# Altium PCB CorroSenseBoard_V4_DaugtherBoard.PcbDoc
Units mm, origin at the board's own origin, x right, y up, seen from the top; angles counter-clockwise.
Board outline 50.17 x 44.45 mm, 4 copper layers (Top Layer, +5V, -5V, Bottom Layer), stack 0.603 mm thick; 75 components, 51 nets, 238 pads, 46 vias.
Unrouted connection lines stored in the file: 7.
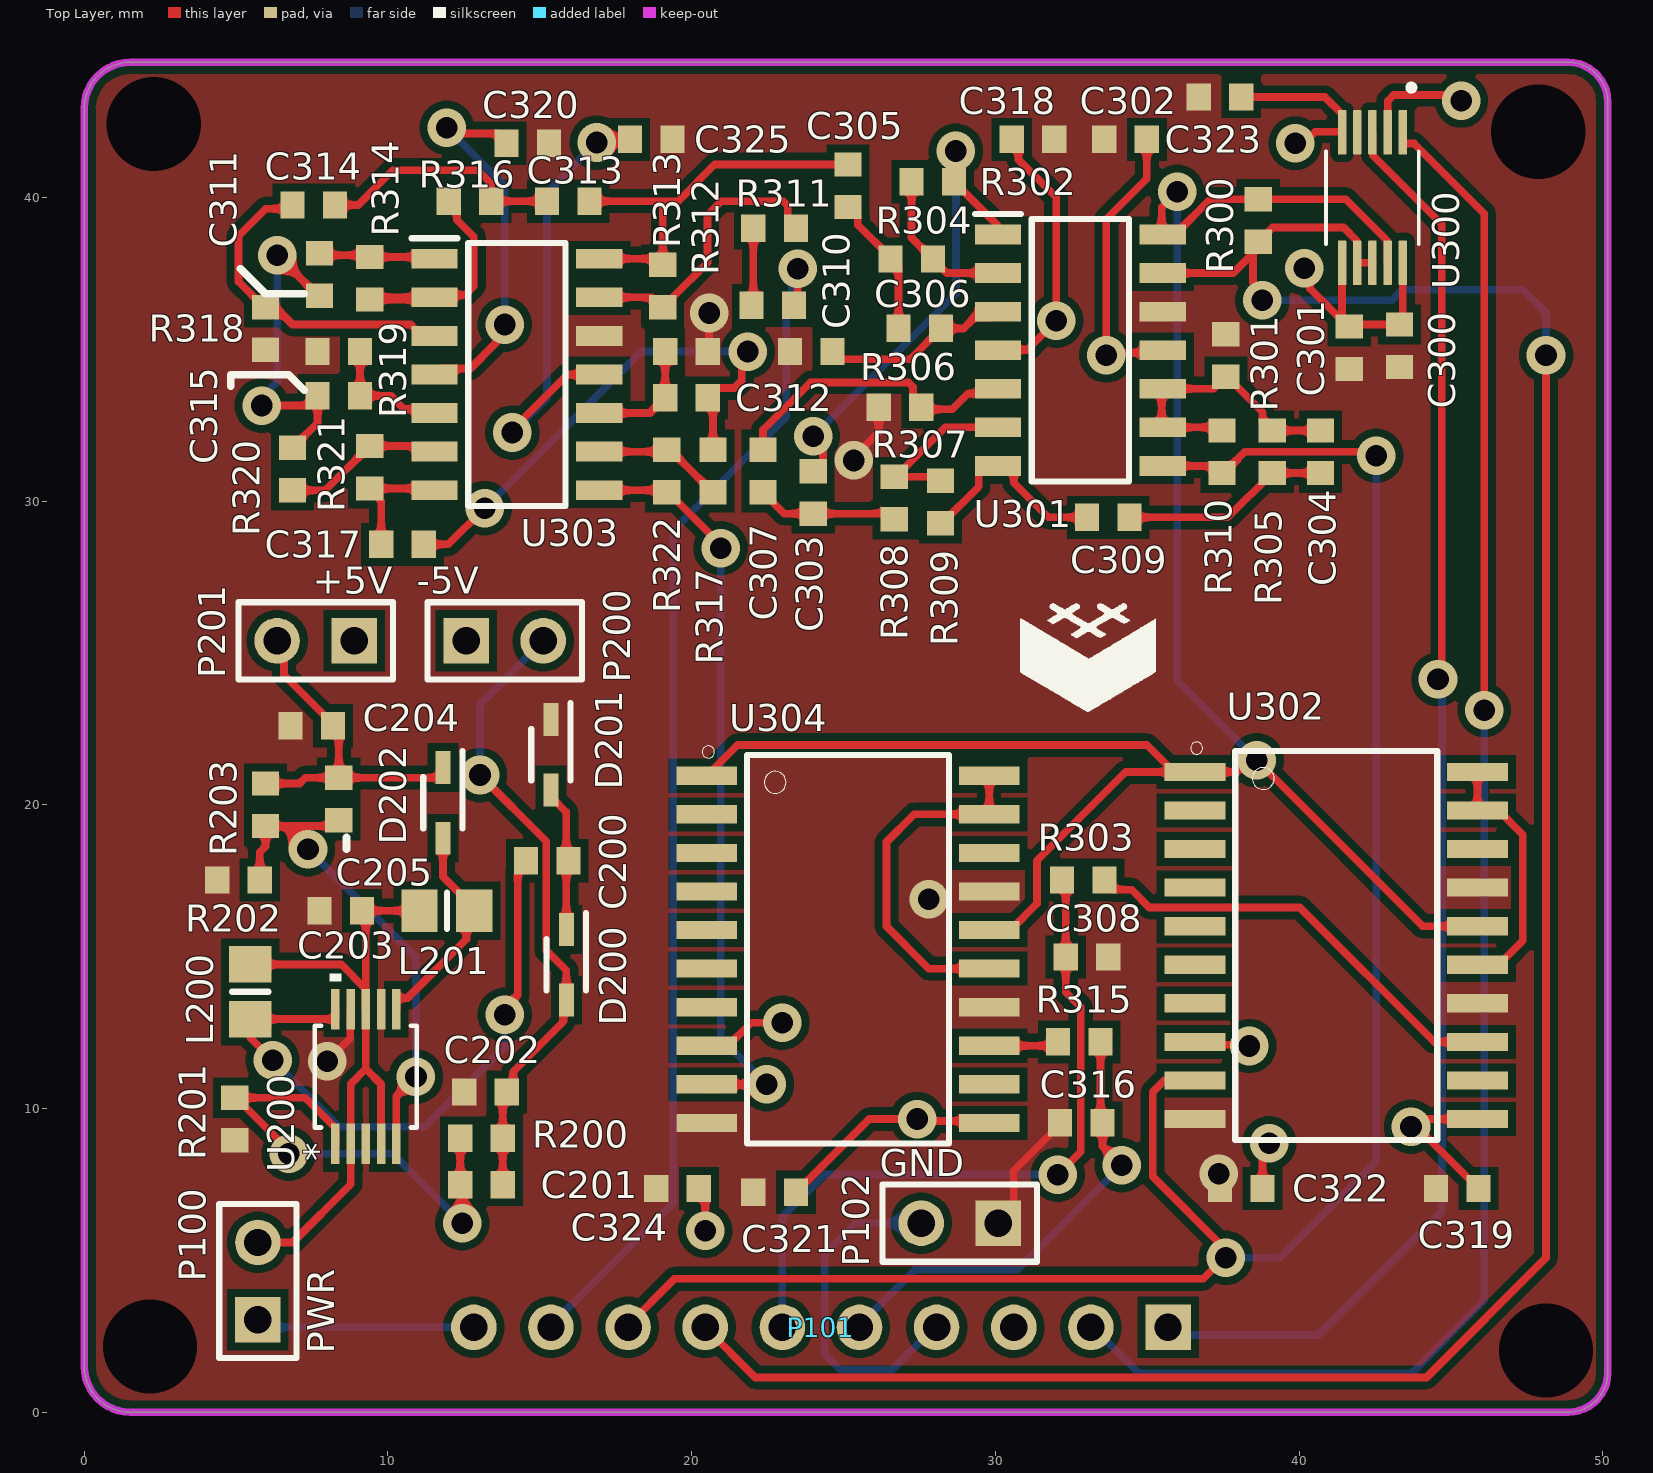
[diagram p0: Top Layer view]
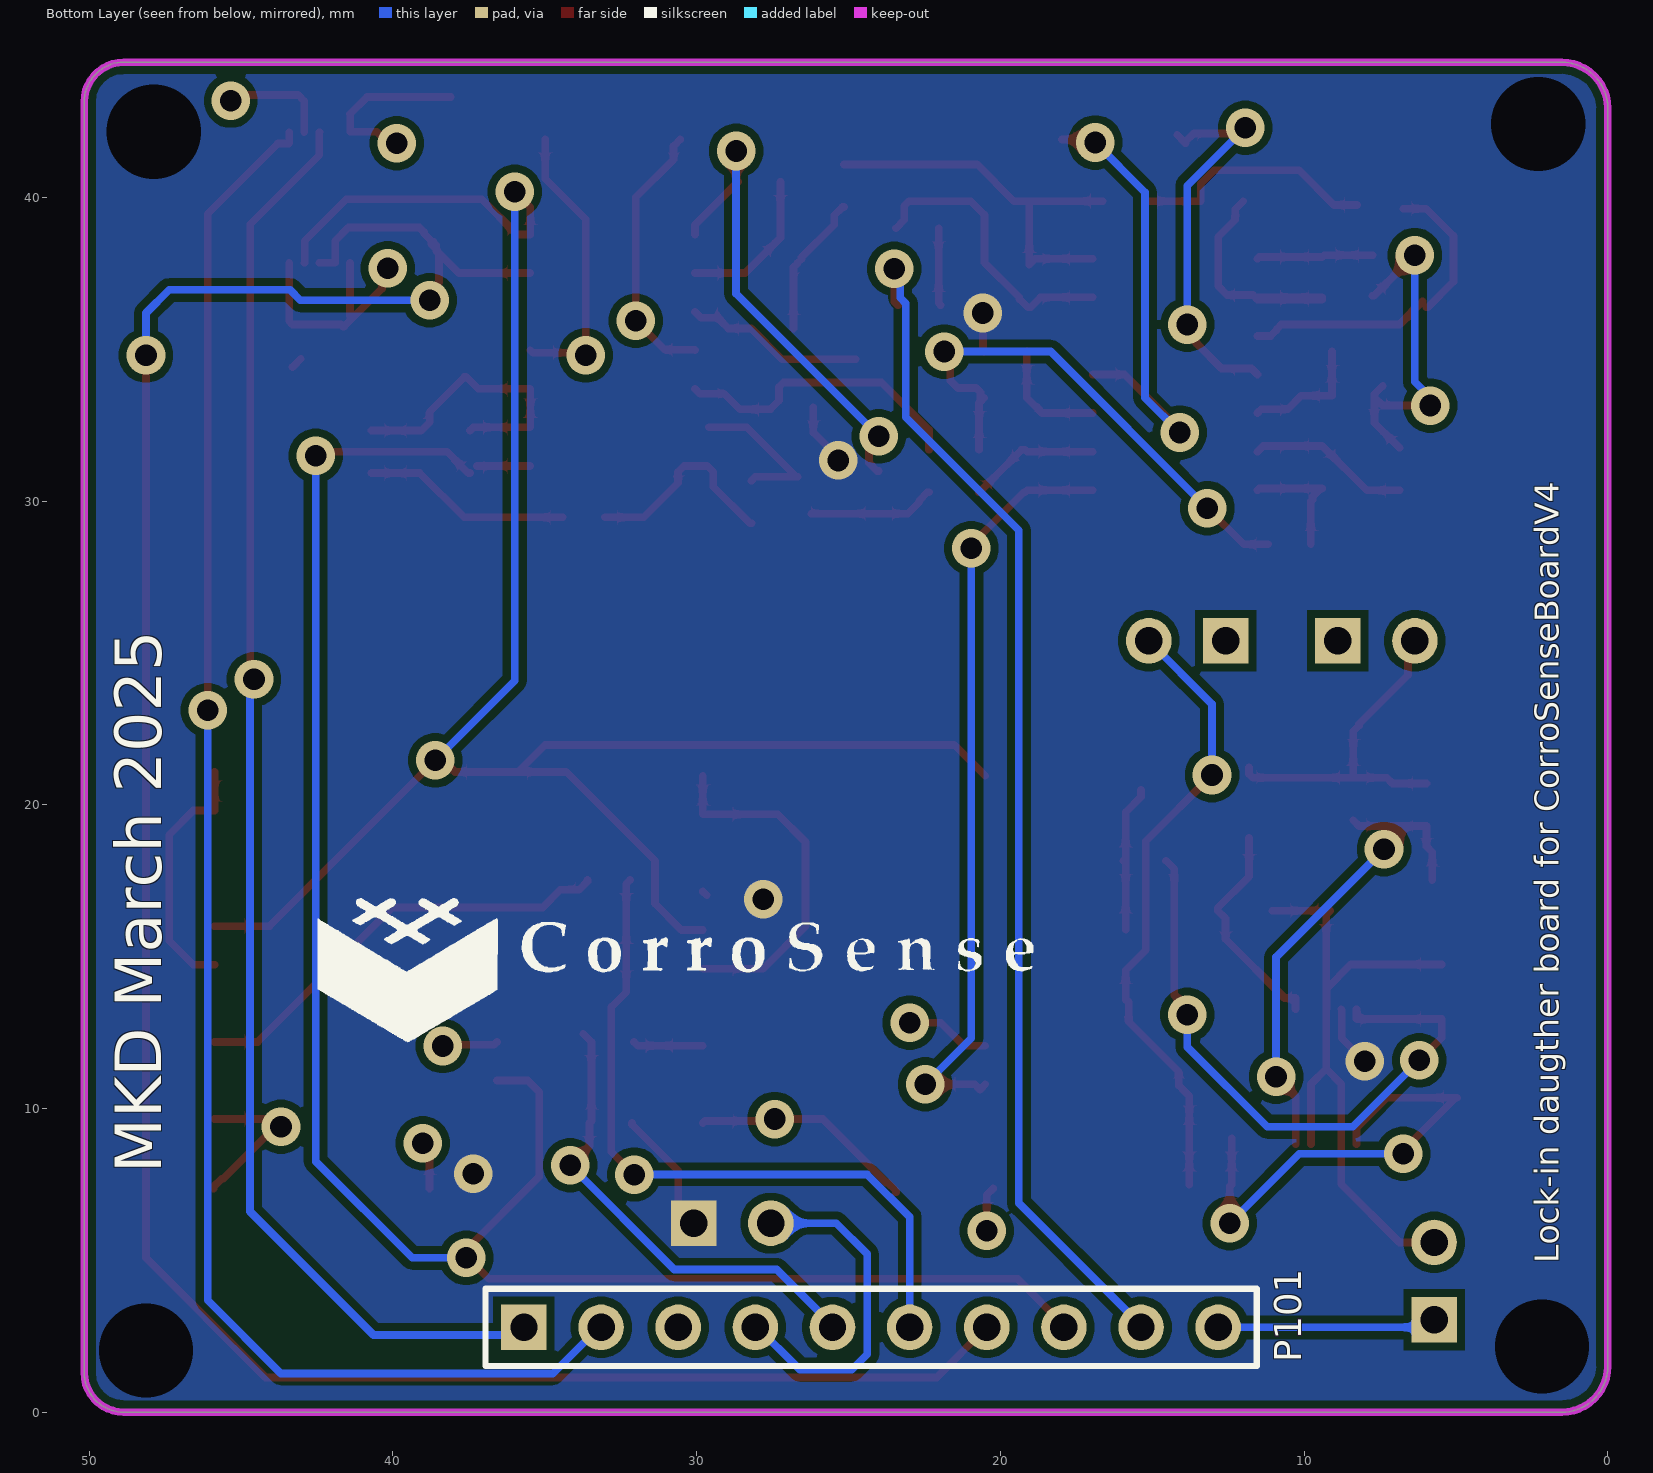
[diagram p1: Bottom Layer view, seen from below]
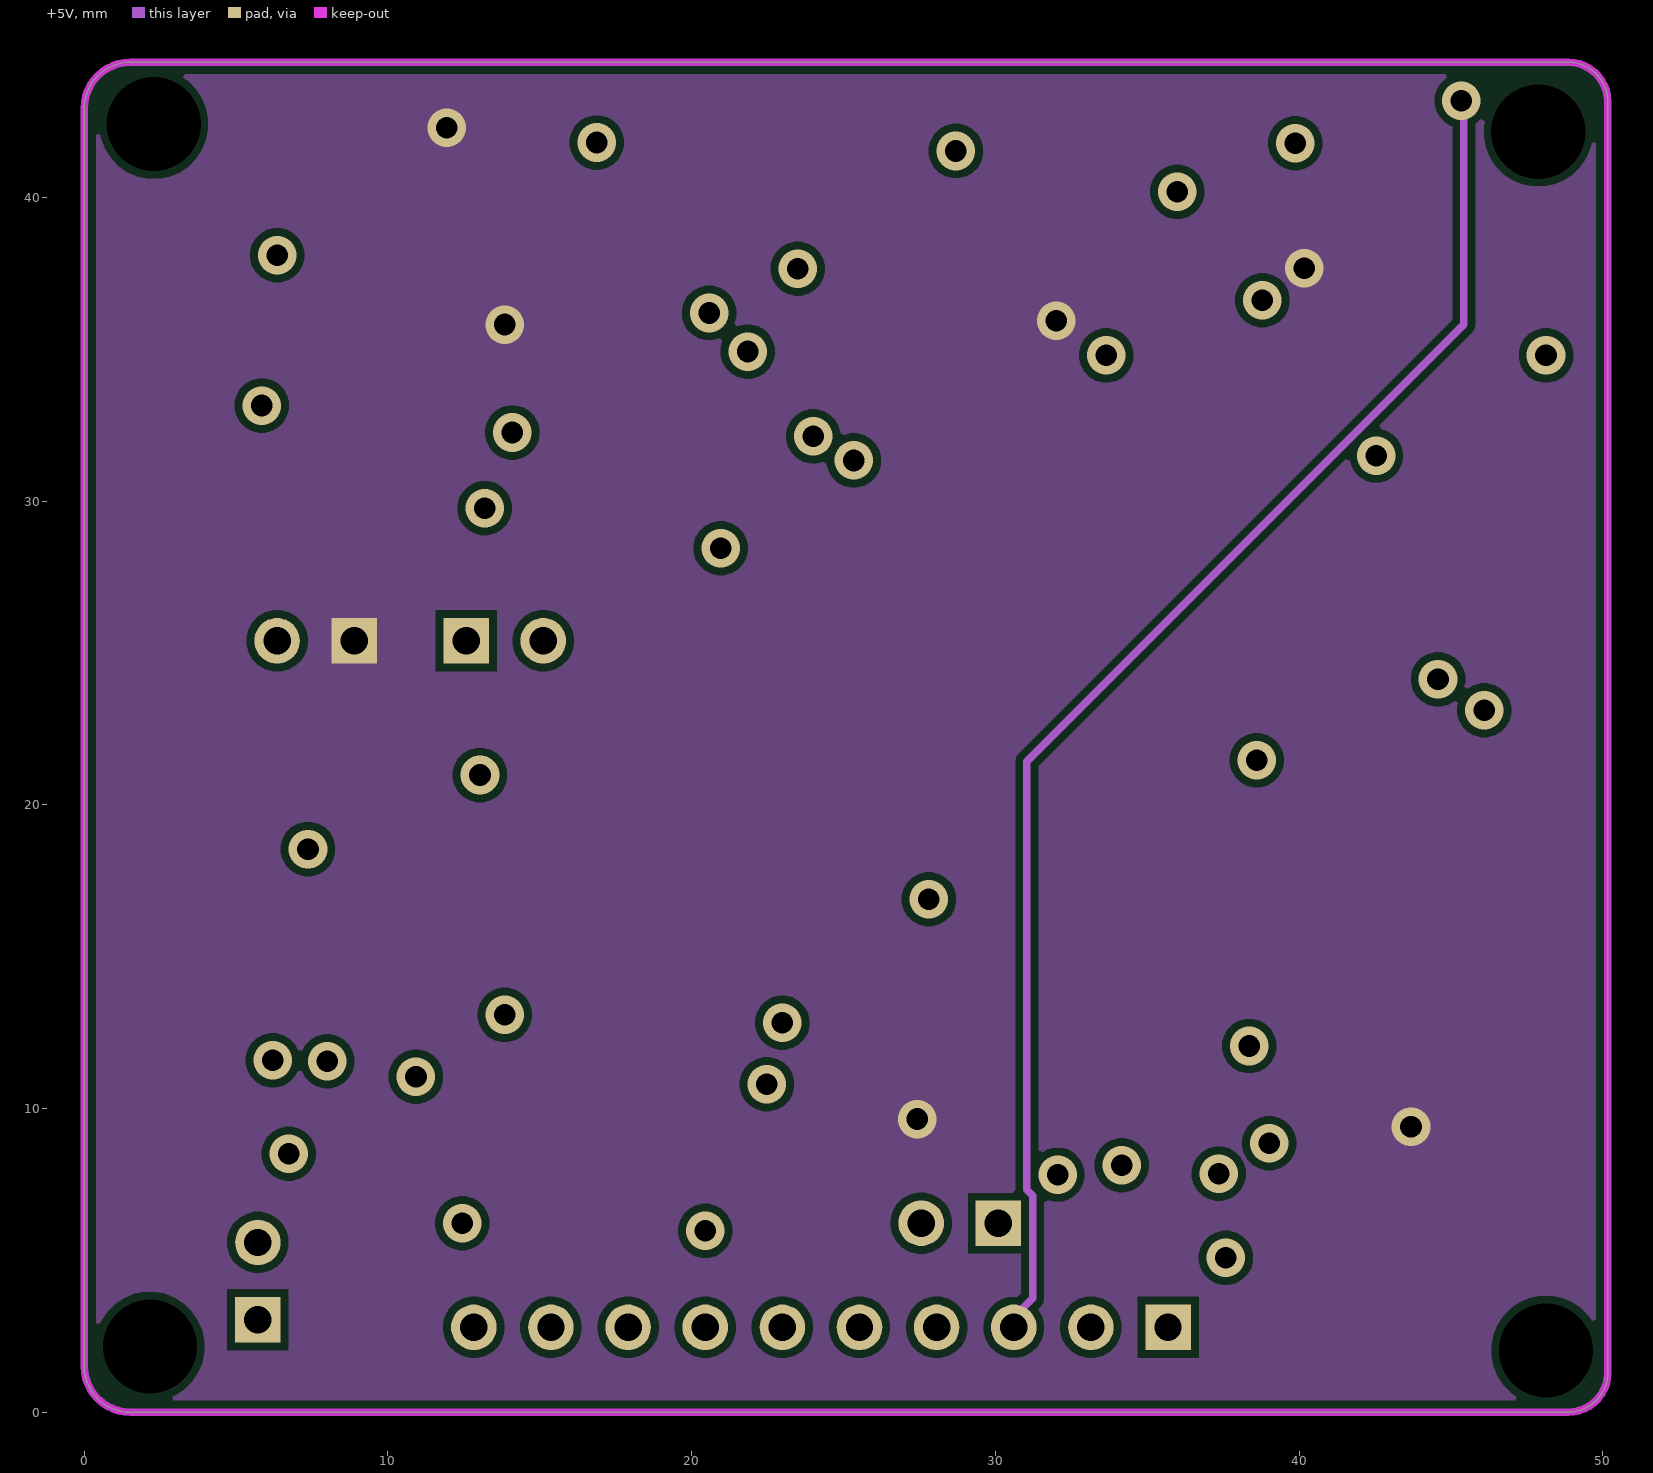
[diagram p2: +5V]
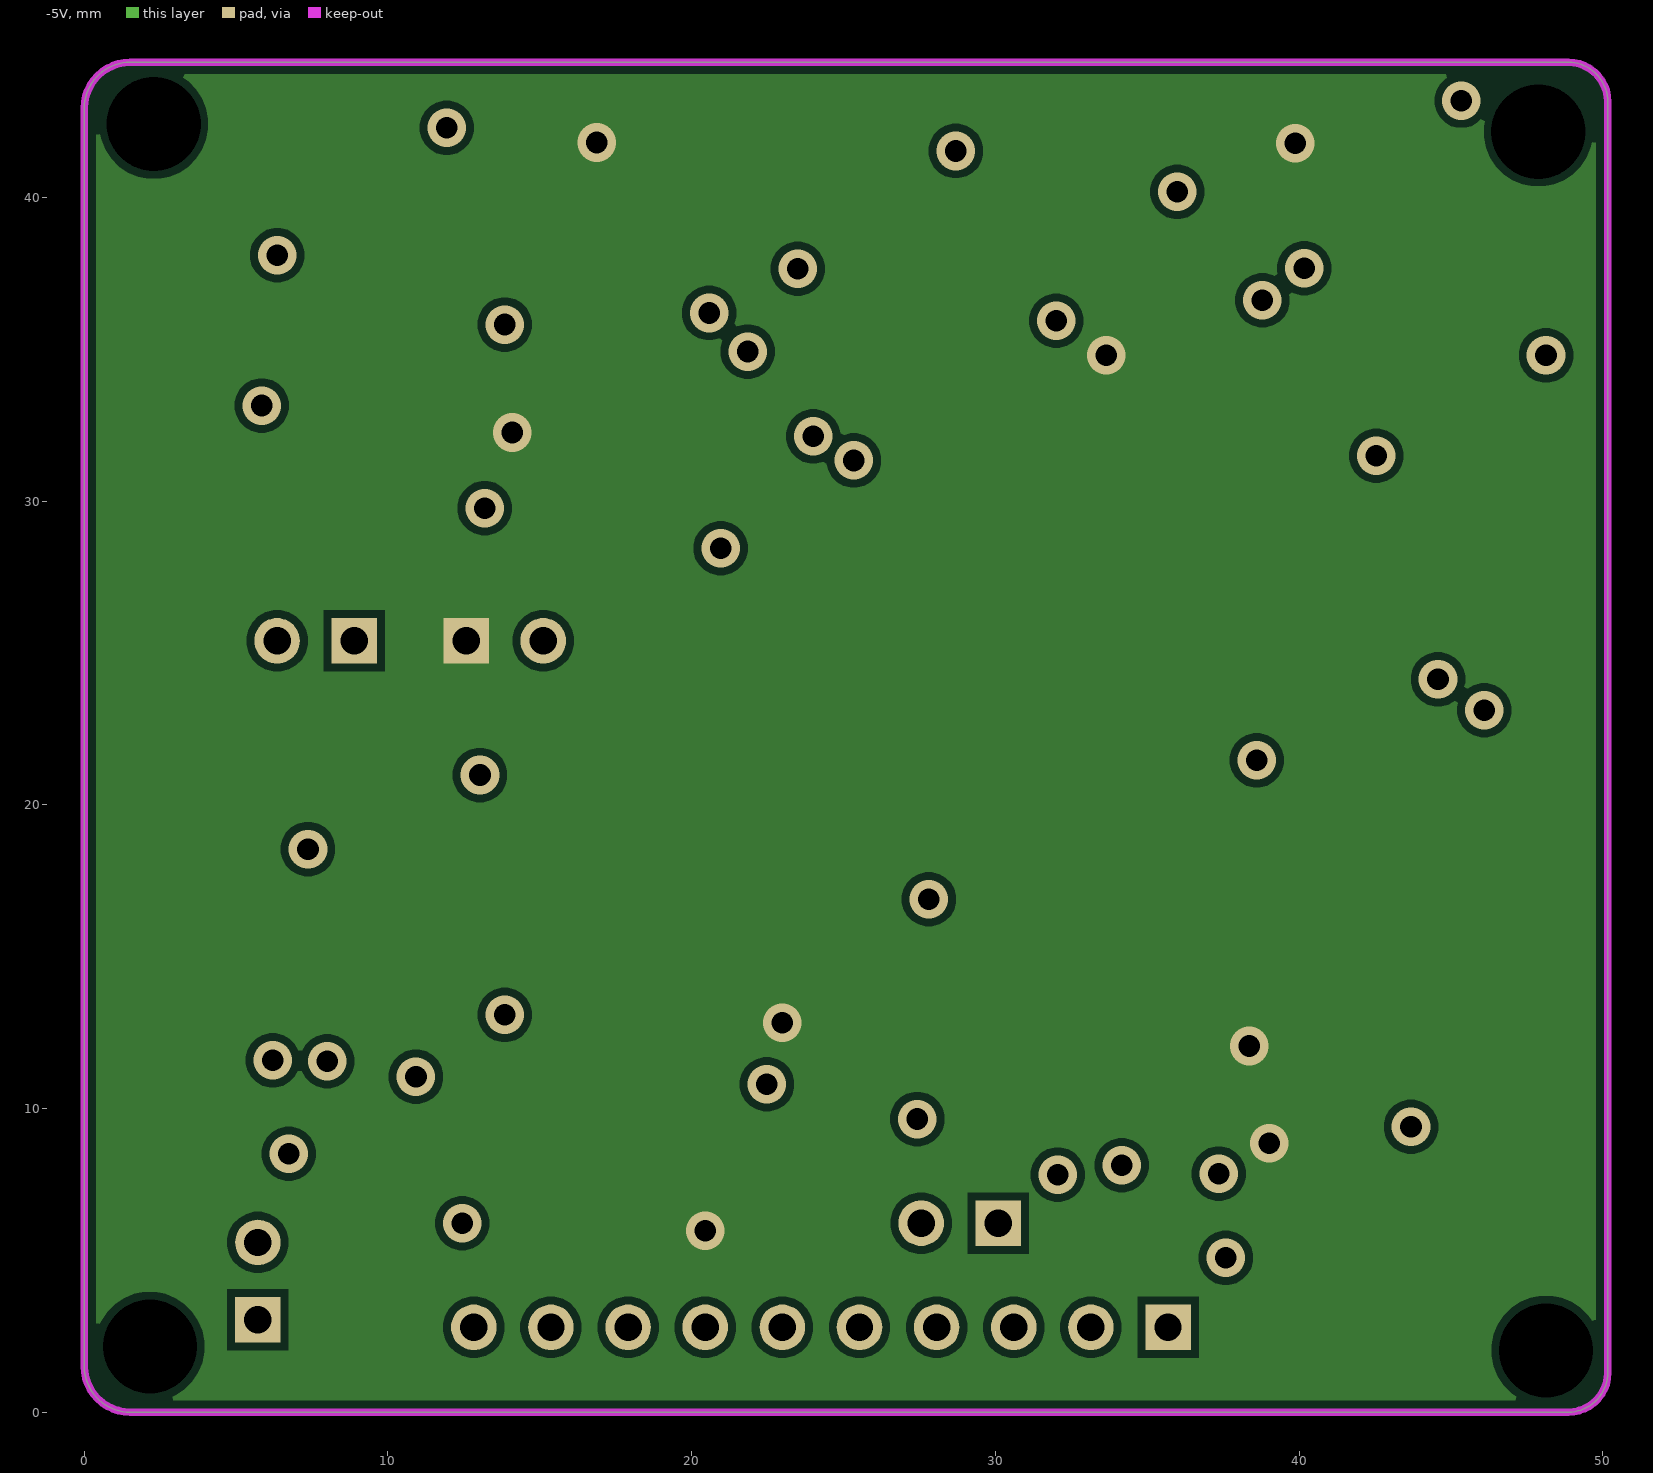
[diagram p3: -5V]

## Layer stack, top to bottom
Top Solder: solder mask 0.0102, Solder Resist, Dk 3.5
Top Layer: signal copper 0.0356
Dielectric 2: prepreg 0.0711, PP-006, Dk 4.1
+5V: signal copper 0.035
Dielectric 1: dielectric 0.32, FR-4, Dk 4.8
-5V: signal copper 0.035
Dielectric 3: prepreg 0.0711, PP-006, Dk 4.1
Bottom Layer: signal copper 0.0356
Bottom Solder: solder mask 0.0102, Solder Resist, Dk 3.5

## Board outline
0,1.511 0,42.939 cw(c1.511,42.939) 1.511,44.45 48.864,44.45 cw(c48.864,43.149) 50.165,43.149 50.165,1.301 cw(c48.864,1.301) 48.864,0 1.511,0 cw(c1.511,1.511)

## Design rules (kind name [scope] priority, off if disabled: settings)
Clearance [All] p1: gap=0.254 ignorepadtopadclearanceinfootprint=FALSE except(0: Arc-Hole Track-Hole SMDPad-Hole THPad-Hole Via-Hole Fill-Hole Poly-Hole Region-Hole Text-Hole; 0.127: Arc-Arc Arc-Track Arc-SMDPad Track-Track Track-SMDPad SMDPad-SMDPad)
PolygonConnect PolygonConnect_7 [All vs IsNamedPolygon('GND_L04_P002')] p1: connectstyle=Direct reliefconductorwidth=0.254 reliefentries=4 polygonreliefangle="90 Angle" airgapwidth=0.254
PolygonConnect PolygonConnect_6 [All vs IsNamedPolygon('-5V_L03_P004')] p2: connectstyle=Direct reliefconductorwidth=0.254 reliefentries=4 polygonreliefangle="90 Angle" airgapwidth=0.254
PolygonConnect PolygonConnect_5 [All vs IsNamedPolygon('+5V_L02_P003')] p3: connectstyle=Direct reliefconductorwidth=0.254 reliefentries=4 polygonreliefangle="90 Angle" airgapwidth=0.254
PolygonConnect PolygonConnect_4 [All vs IsNamedPolygon('GND_L01_P000') or IsNamedPolygon('NONET_L03_P-001')] p4: connectstyle=Direct reliefconductorwidth=0.254 reliefentries=4 polygonreliefangle="90 Angle" airgapwidth=0.254
PolygonConnect PolygonConnect_3 [All vs IsNamedPolygon('GND_L04_P002')] p5: connectstyle=Direct reliefconductorwidth=0.254 reliefentries=4 polygonreliefangle="90 Angle" airgapwidth=0.254
PolygonConnect PolygonConnect_2 [All vs IsNamedPolygon('GND_L01_P000')] p6: connectstyle=Direct reliefconductorwidth=0.254 reliefentries=4 polygonreliefangle="90 Angle" airgapwidth=0.254
PolygonConnect PolygonConnect_1 [All vs IsNamedPolygon('GND_L01_P000')] p7: connectstyle=Direct reliefconductorwidth=0.254 reliefentries=4 polygonreliefangle="90 Angle" airgapwidth=0.254
PolygonConnect [All] p8: connectstyle=Relief reliefconductorwidth=0.254 reliefentries=4 polygonreliefangle="90 Angle" airgapwidth=0.254
RoutingVias [All] p1: holewidth=0.711 width=1.27 viastyle="Through Hole" minholewidth=0.711 minwidth=1.27 maxholewidth=0.711 maxwidth=1.27
SolderMaskExpansion [All] p1: expansion=0.102 istentingtop=FALSE
Width [All] p1: maxlimit=0.762 minlimit=0.254 preferedwidth=0.254 midlayer1_maxwidth=0.254 midlayer2_maxwidth=0.254 minimp=50.000000 maximp=50.000000 favimp=50.000000
30 further rules are at their usual default settings.

## Classes and differential pairs
component class U_Lockin: C300 C301 C302 C303 C304 C305 C306 C307 C308 C309 C310 C311 C312 C313 C314 C315 C316 C317 C318 C319 C320 C321 C322 C323 C324 C325 FB1 R300 R301 R302 R303 R304 R305 R306 R307 R308 R309 R310 R311 R312 R313 R314 R315 R316 R317 R318 R319 R320 R321 R322 REF_OOP1 TIAOUT1 U3 U5 U300 U301 U302 U303 U304
component class U_5Vsupply: +1 -1 C200 C201 C202 C203 C204 C205 D1 D2 D3 D200 D201 D202 L1 L2 L200 L201 P200 P201 R200 R201 R202 R203 U1 U200
component class CorroSenseBoard_V4_DaugtherBoard: P100 P101 P102

## Components (designator, comment, footprint, x,y, rotation, side; value= is the part's Value field where it differs from the comment)
C200 "100nF" 1608[0603] 15.242,18.161 r180 top
C201 "100pF" 1608[0603] 13.081,7.493 r0 top
C202 "1uF" 1608[0603] 13.208,10.541 r180 top
C203 "4.7uF" 1608[0603] 8.444,16.51 r180 top
C204 "1uF" 1608[0603] 7.493,22.606 r0 top
C205 "4.7pF" 1608[0603] 8.382,20.193 r90 top
C300 "100nF" 1608[0603] 43.307,35.114 r90 top
C301 "100nF" 1608[0603] 41.656,35.052 r90 top
C302 "100nF" 1608[0603] 37.4,43.307 r0 top
C303 "1uF" 1608[0603] 24.003,30.288 r270 top
C304 "1nF" 1608[0603] 40.71,31.623 r90 top
C305 "1uF" 1608[0603] 25.146,40.386 r270 top
C306 "1nF" 1608[0603] 27.512,35.687 r0 top
C307 "1nF" 1608[0603] 22.352,30.988 r90 top
C308 "150nF" 1608[0603] 33.02,14.986 r180 top
C309 "1uF" 1608[0603] 33.72,29.464 r180 top
C310 "150nF" 1608[0603] 22.671,36.449 r0 top
C311 "1uF" 1608[0603] 7.747,37.465 r270 top
C312 "1nF" 1608[0603] 19.827,33.401 r180 top
C313 "1uF" 1608[0603] 15.937,39.878 r180 top
C314 "1nF" 1608[0603] 7.558,39.751 r180 top
C315 "1nF" 1608[0603] 8.382,33.471 r0 top
C316 "150nF" 1608[0603] 32.831,9.525 r0 top
C317 "1uF" 1608[0603] 10.476,28.575 r180 top
C318 "100nF" 1608[0603] 31.242,41.91 r180 top
C319 "100nF" 1608[0603] 45.212,7.366 r0 top
C320 "100nF" 1608[0603] 14.605,41.783 r180 top
C321 "100nF" 1608[0603] 22.733,7.239 r0 top
C322 "100nF" 1608[0603] 38.1,7.366 r180 top
C323 "100nF" 1608[0603] 34.29,41.91 r180 top
C324 "100nF" 1608[0603] 19.538,7.366 r180 top
C325 "100nF" 1608[0603] 18.669,41.91 r0 top
D200 "ZHCS400TA" SOD2513X120N 15.875,14.732 r270 top
D201 "ZHCS400TA" SOD2513X120N 15.367,21.649 r270 top
D202 "ZHCS400TA" SOD2513X120N 11.811,20.066 r270 top
L200 "LQM18PN4R7MFRL" 6-0805_N 5.461,13.843 r270 top value=4.7uH
L201 "LQM18PN4R7MFRL" 6-0805_N 11.938,16.51 r0 top value=4.7uH
P100 "Header, 2-Pin" HDR1X2 5.715,3.048 r90 top
P101 "Header, 10-Pin" HDR1X10 35.687,2.794 r180 top
P102 "Header, 2-Pin" HDR1X2 30.099,6.223 r180 top
P200 "Header, 2-Pin" HDR1X2 12.573,25.4 r0 top
P201 "Header, 2-Pin" HDR1X2 8.89,25.4 r180 top
R200 "270K" 1608[0603] 13.081,9.017 r0 top
R201 "100K" 1608[0603] 4.953,9.652 r90 top
R202 "110K" 1608[0603] 5.08,17.526 r180 top
R203 "330K" 1608[0603] 5.969,20.001 r270 top
R300 "1K" 1608[0603] 38.658,39.243 r90 top
R301 "2K" 1608[0603] 37.592,34.798 r270 top
R302 "10K" 1608[0603] 27.94,40.513 r180 top
R303 "5k" 1608[0603] 32.893,17.526 r0 top
R304 "10K" 1608[0603] 27.25,37.973 r180 top
R305 "10K" 1608[0603] 39.116,31.623 r90 top
R306 "62" 1608[0603] 23.941,34.925 r0 top
R307 "470" 1608[0603] 26.859,33.092 r0 top
R308 "10K" 1608[0603] 26.67,30.099 r270 top
R309 "10K" 1608[0603] 28.194,29.972 r90 top
R310 "10K" 1608[0603] 37.465,31.623 r270 top
R311 "5k" 1608[0603] 22.733,38.989 r0 top
R312 "6.8K" 1608[0603] 19.827,34.925 r180 top
R313 "5k" 1608[0603] 19.05,37.084 r270 top
R314 "10K" 1608[0603] 9.398,37.338 r270 top
R315 "5k" 1608[0603] 32.766,12.192 r180 top
R316 "10K" 1608[0603] 12.7,39.878 r0 top
R317 "10K" 1608[0603] 20.701,30.988 r270 top
R318 "220" 1608[0603] 5.969,35.687 r90 top
R319 "910" 1608[0603] 8.382,34.925 r0 top
R320 "10K" 1608[0603] 6.858,31.053 r90 top
R321 "10K" 1608[0603] 9.398,31.115 r90 top
R322 "10K" 1608[0603] 19.177,30.988 r270 top
U200 "LT1945EMSPBF" MSOP-10_MS_LIT 9.271,11.049 r90 top
U300 "MAX5438EUB+" SOP50P490X110-10N 42.418,39.996 r270 top
U301 "TLV9154IDR" SOIC127P600X175-14N 32.798,34.968 r0 top
U302 "AD630ARZ" SOIC127P1032X265-20N 41.226,15.367 r0 top
U303 "TLV9154IDR" SOIC127P600X175-14N 14.244,34.17 r0 top
U304 "AD630ARZ" SOIC127P1032X265-20N 25.148,15.24 r0 top

## Footprints (in the part's own frame and the unit in brackets; to place one, negate y for a bottom-side part, rotate by r counter-clockwise, add the part's x,y. Pads: shape width x height; smd on the part's side, far side on the other; paste and mask are expansions set on the pad)
6-0805_N [mm] "Chip Resistor, Body 2.0x1.2mm, IPC Medium Density"
  rect 1.2x1.4 smd: 1(-0.9,0) 2(0.9,0)
  silkscreen extent 0,-0.6 0,0.6, body extent -1.07,-0.7 1.07,0.7, height 0.7
1608[0603] [mm]
  rect 0.8x0.9 smd: 1(-0.7,0) 2(0.7,0)
  body extent -0.87,-0.48 0.87,0.48, height 1.3
HDR1X2 [mm] "Connector; Header; 2 Position"
  rect 1.5x1.5 hole 0.9: 1(0,0)
  round 1.5 hole 0.9: 2(2.54,0)
  silkscreen extent -1.27,-1.27 3.81,1.27
HDR1X10 [mm] "Connector; Header; 10 Position"
  rect 1.5x1.5 hole 0.9: 1(0,0)
  round 1.5 hole 0.9: 2(2.54,0) 3(5.08,0) 4(7.62,0) 5(10.16,0) 6(12.7,0) 7(15.24,0) 8(17.78,0) 9(20.32,0) 10(22.86,0)
MSOP-10_MS_LIT [mil]
  rect 52.5x11 smd paste+0 mask+0: 1(-87.25,39.4) 2(-87.25,19.7) 3(-87.25,0) 4(-87.25,-19.7) 5(-87.25,-39.4) 6(87.25,-39.4) 7(87.25,-19.7) 8(87.25,0) 9(87.25,19.7) 10(87.25,39.4)
  silkscreen extent -66,-66 134,66, body extent -99,-61 99,61, height 43
SOD2513X120N [mm]
  rect 1.075x0.5 smd: 1(-1.162,0) 2(1.162,0)
  silkscreen extent -1.7,-0.65 0.85,0.65, body extent -1.25,-0.65 1.25,0.65, height 1.2
SOIC127P600X175-14N [mm]
  rect 1.525x0.65 smd: 1(-2.712,3.81) 2(-2.712,2.54) 3(-2.712,1.27) 4(-2.712,0) 5(-2.712,-1.27) 6(-2.712,-2.54) 7(-2.712,-3.81) 8(2.712,-3.81) 9(2.712,-2.54) 10(2.712,-1.27) 11(2.712,0) 12(2.712,1.27) 13(2.712,2.54) 14(2.712,3.81)
  silkscreen extent -3.47,-4.33 1.6,4.48
SOIC127P1032X265-20N [mm]
  rect 2x0.6 smd: 1(-4.65,5.715) 2(-4.65,4.445) 3(-4.65,3.175) 4(-4.65,1.905) 5(-4.65,0.635) 6(-4.65,-0.635) 7(-4.65,-1.905) 8(-4.65,-3.175) 9(-4.65,-4.445) 10(-4.65,-5.715) 11(4.65,-5.715) 12(4.65,-4.445) 13(4.65,-3.175) 14(4.65,-1.905) 15(4.65,-0.635) 16(4.65,0.635) 17(4.65,1.905) 18(4.65,3.175) 19(4.65,4.445) 20(4.65,5.715)
  silkscreen extent -4.8,-6.4 3.33,6.7
SOP50P490X110-10N [mm]
  rrect25% 1.47x0.28 smd: 1(-2.15,1) 2(-2.15,0.5) 3(-2.15,0) 4(-2.15,-0.5) 5(-2.15,-1) 6(2.15,-1) 7(2.15,-0.5) 8(2.15,0) 9(2.15,0.5) 10(2.15,1)
  silkscreen extent -3.72,-1.53 1.53,1.53

## Part data
C200 C300 C301 C302 C318 C319 C320 C321 C322 C323 C324 C325: library part Cap, "CAP CER 25V X7R 0603", Manufacturer="Murata Electronics", MPN=GCJ188R71E104KA12D, Operating Temperature="-55°C ~ 125°C", Package / Case="0603 (1608 Metric)", Temperature Coefficient=X7R, Tolerance=±10%, Voltage - Rated=25V, PackageDescription="Radial Cap, Thru-Hole; 2 Leads; 0.3 in Pin Spacing", PackageReference=RAD-0.3
C201: library part Cap, "CAP CER 25V X7R 0603", Manufacturer="KYOCERA AVX", MPN=06033C101KAT2A, Operating Temperature="-55°C ~ 125°C", Package / Case="0603 (1608 Metric)", Temperature Coefficient=X7R, Tolerance=±10%, Voltage - Rated=25V, PackageDescription="Radial Cap, Thru-Hole; 2 Leads; 0.3 in Pin Spacing", PackageReference=RAD-0.3
C202 C204 C303 C305 C309 C311 C313 C317: library part Cap, "CAP CER 25V X7R 0603", Manufacturer="Murata Electronics", MPN=GCM188R71E105KA64D, Operating Temperature="-55°C ~ 125°C", Package / Case="0603 (1608 Metric)", Temperature Coefficient=X7R, Tolerance=±10%, Voltage - Rated=25V, PackageDescription="Radial Cap, Thru-Hole; 2 Leads; 0.3 in Pin Spacing", PackageReference=RAD-0.3
C203: library part Cap, "CAP CER 25V X7R 0603", Manufacturer="Murata Electronics", MPN=GRM188R61E475KE11J, Operating Temperature="-55°C ~ 125°C", Package / Case="0603 (1608 Metric)", Temperature Coefficient=X7R, Tolerance=±10%, Voltage - Rated=25V, PackageDescription="Radial Cap, Thru-Hole; 2 Leads; 0.3 in Pin Spacing", PackageReference=RAD-0.3
C205: library part Cap, "CAP CER 25V X7R 0603", Manufacturer="Murata Electronics", MPN=GRM1885C1H4R7WA01D, Operating Temperature="-55°C ~ 125°C", Package / Case="0603 (1608 Metric)", Temperature Coefficient=X7R, Tolerance=±10%, Voltage - Rated=25V, PackageDescription="Radial Cap, Thru-Hole; 2 Leads; 0.3 in Pin Spacing", PackageReference=RAD-0.3
C304 C306 C307 C312 C314 C315: library part Cap, "CAP CER 25V X7R 0603", Manufacturer="KYOCERA AVX", MPN=06033C102KAT2A, Operating Temperature="-55°C ~ 125°C", Package / Case="0603 (1608 Metric)", Temperature Coefficient=X7R, Tolerance=±10%, Voltage - Rated=25V, PackageDescription="Radial Cap, Thru-Hole; 2 Leads; 0.3 in Pin Spacing", PackageReference=RAD-0.3
C308 C310 C316: library part Cap, "CAP CER 25V X7R 0603", Manufacturer="Murata Electronics", MPN=GRM188R71E154KA01D, Operating Temperature="-55°C ~ 125°C", Package / Case="0603 (1608 Metric)", Temperature Coefficient=X7R, Tolerance=±10%, Voltage - Rated=25V, PackageDescription="Radial Cap, Thru-Hole; 2 Leads; 0.3 in Pin Spacing", PackageReference=RAD-0.3
D200 D201 D202: "Diode", Manufacturer="Diodes Incorporated", Mouser Part Number=522-ZHCS400TA, Arrow Part Number=ZHCS400TA, Arrow Price/Stock=https://www.arrow.com/en/products/zhcs400ta/diodes-incorporated?region=europe, Datasheet Link=https://www.diodes.com//assets/Datasheets/ZHCS400.pdf, Height=1.2mm, Manufacturer_Name="Diodes Incorporated", Manufacturer_Part_Number=ZHCS400TA, Mouser Price/Stock=https://www.mouser.co.uk/ProductDetail/Diodes-Incorporated/ZHCS400TA?qs=zhx2xqPtQQzuV2hbpdB4gg%3D%3D, MPN=ZHCS400TA
L200 L201: library part Inductor, "FIXED IND 4.7UH 620MA 550MOHM SM", Manufacturer="Murata Electronics", Code_IEC=1005, Code_JEITA=0402, LatestRevisionDate=29-May-2009, LatestRevisionNote="IPC-7351 Footprint Added.", MPN=LQM18PN4R7MFRL, PackageDescription="Chip Inductor", PackageReference=0402-A, Published=8-Jun-2000, Publisher="Altium Limited"
P100 P102 P200 P201: library part "Header 2", Manufacturer="Wurth Elektronik", MPN=61300211121, LatestRevisionDate=17-Jul-2002, LatestRevisionNote="Re-released for DXP Platform.", Publisher="Altium Limited"
P101: library part "Header 10", Manufacturer="Wurth Elektronik", MPN=61301011121, LatestRevisionDate=17-Jul-2002, LatestRevisionNote="Re-released for DXP Platform.", Publisher="Altium Limited"
R200: library part Res1, "RES SMD 2% 1.5W 0603", Manufacturer=YAGEO, MPN=AC0603FR-07270KL, Operating Temperature="-65°C ~ 155°C", Package="0603 (1608 Metric)", Power (Watts)=1.5W, Tolerance=2%, Code_JEITA="Thick Film", Composition="Thick Film", LatestRevisionDate=17-Jul-2002, LatestRevisionNote="Re-released for DXP Platform.", Published=8-Jun-2000, Publisher="Altium Limited"
R201: library part Res1, "RES SMD 2% 1.5W 0603", Manufacturer=YAGEO, MPN=RC0603FR-07100KL, Operating Temperature="-65°C ~ 155°C", Package="0603 (1608 Metric)", Power (Watts)=1.5W, Tolerance=2%, Code_JEITA="Thick Film", Composition="Thick Film", LatestRevisionDate=17-Jul-2002, LatestRevisionNote="Re-released for DXP Platform.", Published=8-Jun-2000, Publisher="Altium Limited"
R202: library part Res1, "RES SMD 2% 1.5W 0603", Manufacturer=YAGEO, MPN=AC0603FR-10110KL, Operating Temperature="-65°C ~ 155°C", Package="0603 (1608 Metric)", Power (Watts)=1.5W, Tolerance=2%, Code_JEITA="Thick Film", Composition="Thick Film", LatestRevisionDate=17-Jul-2002, LatestRevisionNote="Re-released for DXP Platform.", Published=8-Jun-2000, Publisher="Altium Limited"
R203: library part Res1, "RES SMD 2% 1.5W 0603", Manufacturer=YAGEO, MPN=AC0603FR-07330KL, Operating Temperature="-65°C ~ 155°C", Package="0603 (1608 Metric)", Power (Watts)=1.5W, Tolerance=2%, Code_JEITA="Thick Film", Composition="Thick Film", LatestRevisionDate=17-Jul-2002, LatestRevisionNote="Re-released for DXP Platform.", Published=8-Jun-2000, Publisher="Altium Limited"
R300: library part Res1, "RES SMD 2% 1.5W 0603", Manufacturer=YAGEO, MPN=RC0603FR-071KL, Operating Temperature="-65°C ~ 155°C", Package="0603 (1608 Metric)", Power (Watts)=1.5W, Tolerance=2%, Code_JEITA="Thick Film", Composition="Thick Film", LatestRevisionDate=17-Jul-2002, LatestRevisionNote="Re-released for DXP Platform.", Published=8-Jun-2000, Publisher="Altium Limited"
R301: library part Res1, "RES SMD 2% 1.5W 0603", Manufacturer=YAGEO, MPN=AC0603FR-072KL, Operating Temperature="-65°C ~ 155°C", Package="0603 (1608 Metric)", Power (Watts)=1.5W, Tolerance=2%, Code_JEITA="Thick Film", Composition="Thick Film", LatestRevisionDate=17-Jul-2002, LatestRevisionNote="Re-released for DXP Platform.", Published=8-Jun-2000, Publisher="Altium Limited"
R302 R304 R305 R308 R309 R310 R314 R316 R317 R320 R321 R322: library part Res1, "RES SMD 2% 1.5W 0603", Manufacturer=YAGEO, MPN=RC0603FR-0710KL, Operating Temperature="-65°C ~ 155°C", Package="0603 (1608 Metric)", Power (Watts)=1.5W, Tolerance=2%, Code_JEITA="Thick Film", Composition="Thick Film", LatestRevisionDate=17-Jul-2002, LatestRevisionNote="Re-released for DXP Platform.", Published=8-Jun-2000, Publisher="Altium Limited"
R303 R311 R313 R315: library part Res1, "RES SMD 2% 1.5W 0603", Manufacturer=YAGEO, MPN=AC0603FR-134K99L, Operating Temperature="-65°C ~ 155°C", Package="0603 (1608 Metric)", Power (Watts)=1.5W, Tolerance=2%, Code_JEITA="Thick Film", Composition="Thick Film", LatestRevisionDate=17-Jul-2002, LatestRevisionNote="Re-released for DXP Platform.", Published=8-Jun-2000, Publisher="Altium Limited"
R306: library part Res1, "RES SMD 2% 1.5W 0603", Manufacturer=YAGEO, MPN=AC0603FR-0762RL, Operating Temperature="-65°C ~ 155°C", Package="0603 (1608 Metric)", Power (Watts)=1.5W, Tolerance=2%, Code_JEITA="Thick Film", Composition="Thick Film", LatestRevisionDate=17-Jul-2002, LatestRevisionNote="Re-released for DXP Platform.", Published=8-Jun-2000, Publisher="Altium Limited"
R307: library part Res1, "RES SMD 2% 1.5W 0603", Manufacturer=YAGEO, MPN=RC0603FR-07470RL, Operating Temperature="-65°C ~ 155°C", Package="0603 (1608 Metric)", Power (Watts)=1.5W, Tolerance=2%, Code_JEITA="Thick Film", Composition="Thick Film", LatestRevisionDate=17-Jul-2002, LatestRevisionNote="Re-released for DXP Platform.", Published=8-Jun-2000, Publisher="Altium Limited"
R312: library part Res1, "RES SMD 2% 1.5W 0603", Manufacturer=YAGEO, MPN=RC0603FR-106K8L, Operating Temperature="-65°C ~ 155°C", Package="0603 (1608 Metric)", Power (Watts)=1.5W, Tolerance=2%, Code_JEITA="Thick Film", Composition="Thick Film", LatestRevisionDate=17-Jul-2002, LatestRevisionNote="Re-released for DXP Platform.", Published=8-Jun-2000, Publisher="Altium Limited"
R318: library part Res1, "RES SMD 2% 1.5W 0603", Manufacturer=YAGEO, MPN=RC0603FR-10220RL, Operating Temperature="-65°C ~ 155°C", Package="0603 (1608 Metric)", Power (Watts)=1.5W, Tolerance=2%, Code_JEITA="Thick Film", Composition="Thick Film", LatestRevisionDate=17-Jul-2002, LatestRevisionNote="Re-released for DXP Platform.", Published=8-Jun-2000, Publisher="Altium Limited"
R319: library part Res1, "RES SMD 2% 1.5W 0603", Manufacturer=YAGEO, MPN=RC0603FR-07910RL, Operating Temperature="-65°C ~ 155°C", Package="0603 (1608 Metric)", Power (Watts)=1.5W, Tolerance=2%, Code_JEITA="Thick Film", Composition="Thick Film", LatestRevisionDate=17-Jul-2002, LatestRevisionNote="Re-released for DXP Platform.", Published=8-Jun-2000, Publisher="Altium Limited"
U200: "No Description Available", Manufacturer="Analog Devices Inc", Mfr_Name="Analog Devices Inc", MPN=LT1945EMSPBF, RefDes=RefDes, Type=Type
U300: Manufacturer="Analog Devices / Maxim Integrated", Package=None, Availability=Unavailable, MF="{'manufacturer': u'Analog Devices Inc./Maxim Integrated'}", MP=MAX5438EUB+, MPN=MAX5438EUB+, Price=None
U301 U303: library part TLV2444CD, "No Description Available", Manufacturer="Texas Instruments", Mfr_Name="Texas Instruments", MPN=TLV9154IDR, RefDes=RefDes, Type=Type
U302 U304: library part ADI-AD630-RW-20, "Consumer Circuit, PDSO20", Case/Package=SOP, Manufacturer="Analog Devices", Max Operating Temperature=85°C, Max Supply Voltage=16.5V, Min Operating Temperature=-25°C, Min Supply Voltage=5V, Channels=1, MPN=AD630ARZ, Pins=20, RoHS Compliant=Yes

## Free pads (board coordinates)
  round 1.524 hole 3.1: 2(2.159,2.159) 2(2.286,42.418) 2(47.879,42.164) 2(48.133,2.032)

## Via types
v1: diameter 1.27, hole 0.711, Top Layer to Bottom Layer, 46 vias

## Nets (pads, with @x,y where several pads share a name; then routed paths per layer and width w, separated by ;. In a path a pad name is that pad's centre, name@x,y a point inside that pad or via, vN(x,y) a via of type N, cw(c..) or ccw(c..) an arc to the next point about the centre after c; other vN are vias at no path point)
+5V: C300.2 C301.2 C318.2 C319.2 C320.2 C321.2 P201.1 U300.6 U300.10 U301.4 U302.11 U303.4 U304.11 | length 42.8
  Top Layer w0.254: U303.4 11.73,34.368 12.717,34.368 13.539,35.189 13.539,35.235 13.843,35.539 v1(13.843,35.814) ; v1(11.938,42.291) 12.123,42.106 13.632,42.106 13.905,41.833 C320.2 ; C320.2@13.905,41.794 C320.2@14.178,42.067 ; C321.2 23.433,7.289 23.706,7.562 23.756,7.562 25.846,9.652 v1(27.432,9.652) 27.495,9.588 29.734,9.588 U304.11 ; U301.4@30.054,34.968 30.071,34.986 31.049,34.986 v1(32.004,35.941) 32.004,40.005 30.761,41.248 30.761,41.691 C318.2 ; v1(40.17,37.668) 40.364,37.474 40.364,36.994 41.606,35.752 C301.2 41.718,35.814 C300.2 43.418,35.925 U300.10 ; C301.2@41.418,36.087 U300.6 ; v1@43.815,9.398 v1(43.688,9.398) 43.963,9.398 44.217,9.652 U302.11 ; v1@43.88,9.398 45.589,7.689 45.639,7.689 45.912,7.416 C319.2
  Bottom Layer w0.254: v1(11.938,42.291) 13.843,40.386 v1(13.843,35.814)
-5V: C302.2 C322.1 C323.1 C324.1 C325.1 P200.1 U300.5 U301.11 U302.8 U303.11 U304.8 | length 38.6
  Top Layer w0.254: v1(14.097,32.258) 14.097,32.354 15.909,34.166 16.953,34.166 U303.11 ; v1(16.878,41.808) 16.98,41.91 C325.1 ; C324.1 20.447,7.157 v1(20.447,5.969) ; U304.8 21.198,12.065 21.96,12.827 v1(22.987,12.827) ; C323.1 34.99,40.619 33.655,39.284 v1(33.655,34.798) 33.74,34.883 35.393,34.883 U301.11@35.478,34.968 ; U302.8 36.665,12.103 37.855,12.103 37.901,12.057 v1(38.362,12.057) ; C302.2 40.852,43.307 41.418,42.741 41.405,42.728 41.405,42.164 40.534,42.164 40.153,41.783 v1(39.878,41.783) ; C322.1 38.8,8.635 v1(39.02,8.855)
  Bottom Layer w0.254: v1(14.097,32.258) 15.24,33.401 15.24,40.17 v1(16.878,41.808)
DDSSIN: C310.2 P101.9 | length 39.4
  Top Layer w0.254: C310.2 23.495,36.573 v1(23.495,37.65)
  Bottom Layer w0.254: P101.9@15.367,2.866 19.389,6.888 19.389,29.041 23.114,32.766 23.114,36.507 23.301,36.694 23.301,37.456 v1(23.495,37.65)
DUTIN: P101.7 R300.1 U300.7 U300.8 U301.13 | length 81.6
  Top Layer w0.254: P101.7 22.098,1.143 44.196,1.143 48.133,5.08 v1(48.133,34.798) ; U301.13@35.478,37.508 37.827,37.508 38.539,38.22 38.539,38.27 R300.1@38.735,38.466 ; R300.1 R300.1@38.708,38.543 ; v1(38.796,36.614) 38.796,36.889 38.481,37.203 38.481,38.132 38.579,38.23 38.579,38.414 R300.1@38.708,38.543 ; U300.8 U300.7 41.905,37.859 41.905,38.573 41.467,39.011 39.13,39.011 38.981,38.862 38.981,38.816 R300.1@38.708,38.543
  Bottom Layer w0.254: v1(38.796,36.614) 43.049,36.614 43.392,36.957 47.371,36.957 48.133,36.195 v1(48.133,34.798)
DUTOUT: P101.8 R310.2 U301.8 U302.9 | length 65.3
  Top Layer w0.254: P101.8@17.907,2.866 19.435,4.394 36.841,4.394 37.527,5.08 v1(37.592,5.08) 37.592,5.348 35.179,7.761 35.179,10.541 35.56,10.922 U302.9 ; U301.8@35.478,31.158 R310.2@37.23,31.158 ; R310.2 37.515,30.923 38.215,31.623 42.418,31.623 v1(42.545,31.496)
  Bottom Layer w0.254: v1(37.592,5.08) 39.37,5.08 42.545,8.255 v1(42.545,31.496)
GND: C202.2 C203.2 C204.1 C300.1 C301.1 C302.1 C308.1 C316.1 C318.1 C319.1 C320.1 C321.1 C322.2 C323.2 C324.2 C325.2 D201.1 P102.1 pad.2 R201.1 R202.2 R301.1 R306.1 R307.1 R312.1 R318.1 R319.1 U200.3 U200.7 U200.9 U300.4 U301.12 U302.10 U302.14 U302.17 U303.12 U304.10 U304.14 U304.17 | length 10.8
  Top Layer w0.254: v1(8.001,11.557) 8.758,12.314 8.758,13.252 U200.9 ; R312.1 20.574,34.972 v1(20.574,36.195) ; v1(25.342,31.338) 25.342,31.444 26.159,32.261 R307.1 ; v1(27.813,16.891) v1@27.94,17.018 ; U304.17@29.671,17.018 U304.17 ; P102.1 30.607,6.731 30.607,7.951 32.131,9.475 C316.1 ; v1(37.358,7.854) 37.358,7.408 C322.2 ; C300.1@43.034,34.687 C300.1
MeasX: C308.2 P101.6 R303.1 | length 23.5
  Top Layer w0.254: v1(32.055,7.823) 32.812,8.58 32.812,13.34 32.32,13.832 C308.2 32.32,17.399 R303.1
  Bottom Layer w0.254: P101.6@22.987,2.866 22.987,6.426 24.384,7.823 v1(32.055,7.823)
MeasY: C316.2 P101.5 R315.1 | length 15.6
  Top Layer w0.254: R315.1@33.739,12.465 R315.1 33.466,9.59 C316.2 33.531,8.76 v1(34.163,8.128)
  Bottom Layer w0.254: P101.5@25.527,2.866 27.106,4.445 27.36,4.699 30.734,4.699 v1(34.163,8.128)
MOSI: P101.3 U300.2 | length 50.3
  Top Layer w0.254: U300.2 42.918,43.172 43.12,43.374 45.145,43.374 v1(45.339,43.18)
  +5V w0.254: P101.3 30.607,3.131 31.23,3.754 31.23,7.131 31.039,7.322 31.039,21.427 45.426,35.814 45.426,43.093 v1(45.339,43.18)
NetC200_1: C200.1 D200.1 D201.2 | length 4.9
  Top Layer w0.254: D201.2 15.367,20.268 15.875,19.76 C200.1@15.875,18.161 ; D200.1 C200.1@15.875,18.161 ; C200.1 C200.1@15.875,18.161
NetC200_2: C200.2 L200.2 U200.10 | length 20.8
  Top Layer w0.254: v1(6.206,11.583) 5.461,12.329 L200.2 8.258,12.943 8.27,12.956 U200.10 ; v1(13.843,13.081) 13.843,13.312 14.269,13.738 14.269,17.888 C200.2
  Bottom Layer w0.254: v1(6.206,11.583) 8.392,9.398 11.216,9.398 13.843,12.025 v1(13.843,13.081)
NetC201_1: C201.1 R200.1 R201.2 U200.1 | length 16.3
  Top Layer w0.254: R201.2 R201.2@5.003,10.352 ; v1(6.731,8.509) 6.731,8.624 R201.2@5.003,10.352 ; U200.1 8.27,9.36 7.278,10.352 R201.2@5.003,10.352 ; R200.1 C201.1 12.446,7.428 v1(12.446,6.223)
  Bottom Layer w0.254: v1(6.731,8.509) 10.16,8.509 v1(12.446,6.223)
NetC201_2: C201.2 C202.1 D200.2 P200.2 R200.2 | length 20.9
  Top Layer w0.254: v1(13.03,20.98) 15.215,18.796 15.215,15.215 15.875,14.554 D200.2@15.875,13.617 ; C201.2 R200.2 13.781,10.414 C202.1 14.125,10.758 14.125,11.204 15.774,12.853 15.774,13.515 D200.2@15.875,13.617 ; D200.2 D200.2@15.875,13.617
  Bottom Layer w0.254: v1(13.03,20.98) 13.03,23.317 P200.2
NetC204_2: C204.2 C205.2 D202.1 P201.2 R203.1 | length 11.5
  Top Layer w0.254: R203.1 7.087,20.701 7.279,20.893 C205.2 ; P201.2 6.58,25.17 6.58,24.269 8.193,22.656 C204.2 8.382,22.417 C205.2 ; D202.1 11.811,21.016 11.688,20.893 C205.2
NetC205_1: C205.1 R202.1 R203.2 U200.5 | length 16.9
  Top Layer w0.254: R202.1 5.78,18.44 5.969,18.629 R203.2 6.607,19.301 ; v1(7.366,18.542) 6.607,19.301 ; C205.1 8.19,19.301 6.607,19.301 ; U200.5 10.272,10.399 v1(10.922,11.049)
  Bottom Layer w0.254: v1(7.366,18.542) 10.922,14.986 v1(10.922,11.049)
NetC303_1: C303.1 R302.1 U301.1 | length 16.1
  Top Layer w0.254: C303.1 24.053,30.988 24.326,31.261 24.326,31.808 v1(24.003,32.131) ; v1(28.702,41.529) 28.702,40.575 R302.1 30.054,39.099 U301.1@30.054,38.778
  Bottom Layer w0.254: v1(24.003,32.131) 28.702,36.83 v1(28.702,41.529)
NetC303_2: C303.2 C307.1 R308.2 | length 4.2
  Top Layer w0.254: C307.1 22.402,30.288 22.675,30.015 22.675,29.965 23.052,29.588 R308.2@26.225,29.588
NetC304_2: C304.2 R301.2 R305.2 R310.1 U301.9 U301.10 | length 9.6
  Top Layer w0.254: R310.1 37.36,32.428 35.478,32.428 35.478,33.698 37.192,33.698 R301.2 37.642,34.098 38.793,32.947 38.793,32.596 39.066,32.323 R305.2 C304.2
NetC305_1: C305.1 C313.1 R313.1 U303.14 | length 13.3
  Top Layer w0.254: C313.1 18.985,39.878 ; U303.14 18.854,37.98 R313.1 19.05,39.813 18.985,39.878 ; C305.1 20.766,41.086 19.558,39.878 18.985,39.878
NetC305_2: C305.2 C306.1 R304.2 | length 4.5
  Top Layer w0.254: C305.2 25.196,39.686 25.469,39.413 25.469,39.104 26.55,38.023 R304.2 ; R304.2@26.677,37.839 26.812,37.704 C306.1
NetC306_2: C306.2 R306.2 U301.3 | length 5.9
  Top Layer w0.254: R306.2@24.765,34.671 27.196,34.671 C306.2 28.956,35.687 29.309,36.04 29.856,36.04 U301.3@30.054,36.238
NetC307_2: C307.2 R307.2 U301.5 | length 9.9
  Top Layer w0.254: C307.2 22.352,32.345 23.916,33.909 27.137,33.909 27.286,33.76 27.286,33.315 R307.2@27.559,33.042 ; R307.2@27.559,33.02 28.575,33.02 29.094,33.539 29.895,33.539 U301.5@30.054,33.698
NetC309_2: C309.2 R309.1 U301.7 | length 6.8
  Top Layer w0.254: R309.1 28.244,29.272 29.451,30.479 29.451,30.96 29.649,31.158 U301.7 30.413,31.158 30.611,30.96 30.611,30.601 31.748,29.464 C309.2
NetC310_1: C310.1 R311.1 | length 2.6
  Top Layer w0.254: C310.1 22.033,36.511 R311.1
NetC311_1: C311.1 R314.1 U303.1 | length 3.8
  Top Layer w0.254: C311.1@7.747,38.1 9.336,38.1 R314.1 11.474,38.038 U303.1
NetC311_2: C311.2 C315.1 R320.2 | length 11.6
  Top Layer w0.254: v1(5.842,33.147) C315.1@7.308,33.147 ; v1(6.35,38.1) 6.362,38.1 7.697,36.765 C311.2 ; R320.2 7.682,32.577 C315.1@7.682,33.421 ; C315.1@7.309,33.148 7.409,33.148 C315.1@7.682,33.421 ; C315.1@7.409,33.794 7.682,33.521 C315.1 C315.1@7.682,33.421
  Bottom Layer w0.254: v1(5.842,33.147) 5.842,33.422 6.35,33.93 v1(6.35,38.1)
NetC312_2: C312.2 R312.2 U303.10 | length 3.9
  Top Layer w0.254: U303.10 18.626,32.9 C312.2 R312.2
NetC313_2: C313.2 C314.1 R316.2 | length 8.2
  Top Layer w0.254: C314.1 9.017,39.751 10.16,40.894 12.954,40.894 13.4,40.448 R316.2 C313.2
NetC314_2: C314.2 R318.2 U303.3 | length 10.7
  Top Layer w0.254: R318.2 5.919,36.387 5.08,37.226 5.08,38.735 5.973,39.628 C314.2@6.735,39.628 ; R318.2@6.096,36.576 6.858,35.814 10.748,35.814 10.897,35.665 10.897,35.638 11.095,35.44 U303.3
NetC315_2: C315.2 R319.2 U303.5 | length 4.1
  Top Layer w0.254: R319.2 C315.2 10.1,33.471 10.543,33.028 11.403,33.028 U303.5
NetC317_2: C317.2 R321.1 U303.7 | length 4.1
  Top Layer w0.254: R321.1 R321.1@9.448,30.415 ; C317.2 9.776,29.993 9.721,30.048 9.721,30.142 R321.1@9.448,30.415 ; U303.7 11.477,30.415 R321.1@9.448,30.415
NetD202_2: D202.2 L201.2 U200.6 | length 7.3
  Top Layer w0.254: U200.6 10.284,13.278 10.284,13.637 10.644,13.637 12.584,15.578 12.584,16.256 L201.2 12.838,16.61 11.811,17.637 D202.2
NetP100_1: P100.1 P101.10 | length 7.7
  Bottom Layer w0.254: P100.1@5.207,3.048 5.461,2.794 P101.10
NetP101_4: P101.4 P102.2 | length 11.4
  Bottom Layer w0.254: P102.2 25.4,6.223 24.384,5.207 24.384,1.905 24.892,1.397 26.598,1.397 P101.4@28.067,2.866
NetR302_2: R302.2 R304.1 U301.2 | length 5.1
  Top Layer w0.254: R302.2 27.24,38.676 27.943,37.973 28.408,37.508 U301.2@30.054,37.508
NetR303_2: R303.2 U302.13 | length 14.5
  Top Layer w0.254: R303.2 33.593,17.476 33.866,17.203 34.486,17.203 35.073,16.616 40.026,16.616 44.45,12.192 U302.13
NetR308_1: R308.1 R309.2 U301.6 | length 5.1
  Top Layer w0.254: R308.1 R308.1@26.72,30.799 ; R309.2 28.067,30.799 R308.1@26.72,30.799 ; U301.6@29.591,32.428 28.349,32.428 R308.1@26.72,30.799
NetR311_2: R311.2 R313.2 U303.13 | length 9.6
  Top Layer w0.254: U303.13 18.674,36.71 19,36.384 19.1,36.384 19.373,36.657 19.373,36.707 20.524,37.858 20.524,39.425 20.977,39.878 23.011,39.878 23.16,39.729 23.16,39.262 R311.2
NetR314_2: R314.2 R316.1 U303.2 | length 9
  Top Layer w0.254: U303.2 9.398,36.71 R314.2 11.532,36.638 11.678,36.784 12.527,36.784 12.827,37.084 12.827,38.709 12.27,39.267 12.27,39.608 R316.1
NetR315_2: R315.2 U304.13 | length 2.3
  Top Layer w0.254: U304.13 31.939,12.065 R315.2
NetR317_2: R317.2 R322.1 U303.9 | length 4.3
  Top Layer w0.254: U303.9 19.119,31.63 R322.1 19.301,31.688 R317.2
NetR320_1: R320.1 R321.2 U303.6 | length 5.4
  Top Layer w0.254: R320.1 7.936,30.353 R321.2 11.347,31.815 U303.6
NetR322_2: R322.2 U303.8 U304.9 | length 25.3
  Top Layer w0.254: U303.8 19.105,30.36 R322.2 19.227,30.288 20.955,28.56 v1(20.955,28.448) ; U304.9 20.671,10.622 20.844,10.795 v1(22.479,10.795)
  Bottom Layer w0.254: v1(20.955,28.448) 20.955,12.319 v1(22.479,10.795)
NetU302_15: U302.15 U302.19 U302.20 | length 8.4
  Top Layer w0.254: U302.15 46.576,14.732 47.371,15.527 47.371,19.017 46.576,19.812 U302.19 U302.20
NetU304_15: U304.15 U304.19 U304.20 | length 11.8
  Top Layer w0.254: U304.15 27.813,14.605 26.416,16.002 26.416,18.774 27.327,19.685 U304.19 U304.20
NSS6: P101.1 U300.3 | length 47.4
  Top Layer w0.254: U300.3 42.431,42.133 42.431,41.389 44.704,39.116 44.704,24.257 v1(44.577,24.13)
  Bottom Layer w0.254: P101.1 35.941,2.54 40.64,2.54 44.708,6.608 44.708,23.999 v1(44.577,24.13)
OUT300: C304.1 C309.1 R305.1 | length 6.9
  Top Layer w0.254: C309.1 37.657,29.464 R305.1 C304.1
OUT301: C312.1 C317.1 R317.1 | length 17.6
  Top Layer w0.254: C317.1 11.989,28.575 v1(13.183,29.769) ; C312.1 C312.1@20.654,33.274 ; R317.1 20.701,33.227 C312.1@20.654,33.274 ; v1(21.844,34.925) 21.65,34.731 21.65,33.971 21.403,33.724 20.8,33.724 20.654,33.578 C312.1@20.654,33.274
  Bottom Layer w0.254: v1(13.183,29.769) 18.339,34.925 v1(21.844,34.925)
PWR+DC: C203.1 L200.1 L201.1 P100.2 U200.2 U200.4 U200.8 | length 22.5
  Top Layer w0.254: L200.1 8.458,14.743 9.258,13.943 9.258,13.278 U200.8 ; P100.2 6.858,5.588 8.771,7.501 U200.2 8.771,10.805 9.271,11.306 ; U200.4 9.771,10.805 9.271,11.306 ; L201.1 C203.1 9.271,16.383 U200.8 ; 9.271,11.306 U200.8
SCK: P101.2 U300.1 | length 54.4
  Top Layer w0.254: U300.1 43.418,41.787 43.431,41.774 43.79,41.774 46.101,39.463 v1(46.101,23.114)
  Bottom Layer w0.254: P101.2@33.147,2.866 34.743,1.27 43.688,1.27 46.101,3.683 v1(46.101,23.114)
Vsignal: R300.2 U300.9 U301.14 U302.1 U302.16 U304.1 U304.16 | length 68.3
  Top Layer w0.254: U304.1 21.514,21.971 34.987,21.971 U302.1@35.876,21.082 ; U304.16 30.498,15.875 31.369,16.746 31.369,18.161 34.29,21.082 U302.1@35.876,21.082 ; v1(35.991,40.183) 35.478,39.67 35.478,38.778 35.915,38.778 37.08,39.943 41.535,39.943 42.905,38.573 42.905,37.859 U300.9 ; U302.16 44.069,16.002 v1(38.608,21.463) 38.338,21.463 37.957,21.082 U302.1 U302.1@35.876,21.082
  Bottom Layer w0.254: v1(35.991,40.183) 35.991,24.08 v1(38.608,21.463)
pads on no net: U302.2 U302.3 U302.4 U302.5 U302.6 U302.7 U302.12 U302.18 U304.2 U304.3 U304.4 U304.5 U304.6 U304.7 U304.12 U304.18

## Polygon pours and split planes (outlines as drawn)
GND on Bottom Layer "NONET_L03_P-001" (solid, remove dead copper, pour order 5): 0,45.974 49.657,45.974 51.816,43.815 51.816,1.524 50.292,0 0,0
GND on Bottom Layer "GND_L04_P002" (solid, remove dead copper, pour order 2): 0,44.45 50.038,44.45 50.038,0.254 50.292,0 0,0 0,11.303
-5V on -5V "-5V_L03_P004" (solid, remove dead copper, pour order 4): 0,46.736 0.127,46.609 50.165,46.609 50.165,-0.127 0,-0.127
GND on Top Layer "GND_L01_P000" (solid, remove dead copper, pour order 0): 0,47.244 0.127,47.117 50.165,47.117 50.165,0.381 0,0.381
+5V on +5V "+5V_L02_P003" (solid, remove dead copper, pour order 3): 0,47.117 0.127,46.99 50.165,46.99 50.165,0.254 0,0.254

## Keep-outs
Keep-Out Layer:
  the board outline again, w0.254

## Silkscreen, mask and mechanical layers (free items; w line width, h text height)
Top Overlay:
  drawing of 8 lines, arcs and shapes, not listed
  text "+5V" at 7.518,26.949 h0.89
  text "-5V" at 10.947,26.949 h0.89
  text "GND" at 26.187,7.772 h0.89
  text "PWR" at 8.23,1.93 h0.89 r90
Bottom Overlay:
  drawing of 12 lines, arcs and shapes, not listed
  text "MKD March 2025" at 47.625,7.874 h1.52 r270
  text "Lock-in daugther board for CorroSenseBoardV4" at 1.609,4.902 h0.79 r270

## Text inside footprints (layer, text, board x,y; h text height)
U200: Top Overlay "*" at 8.118,8.261 h0.89 r90; Mechanical 13 "*" at 9.068,9.563 h0.89 r90